# Altium PCB battery.PcbDoc
Units mm, origin at the board's own origin, x right, y up, seen from the top; angles counter-clockwise.
Board outline 59.4 x 23.11 mm, 2 copper layers (Top Layer, Bottom Layer), stack 1.391 mm thick; 6 components, 3 nets, 8 pads, 25 vias.
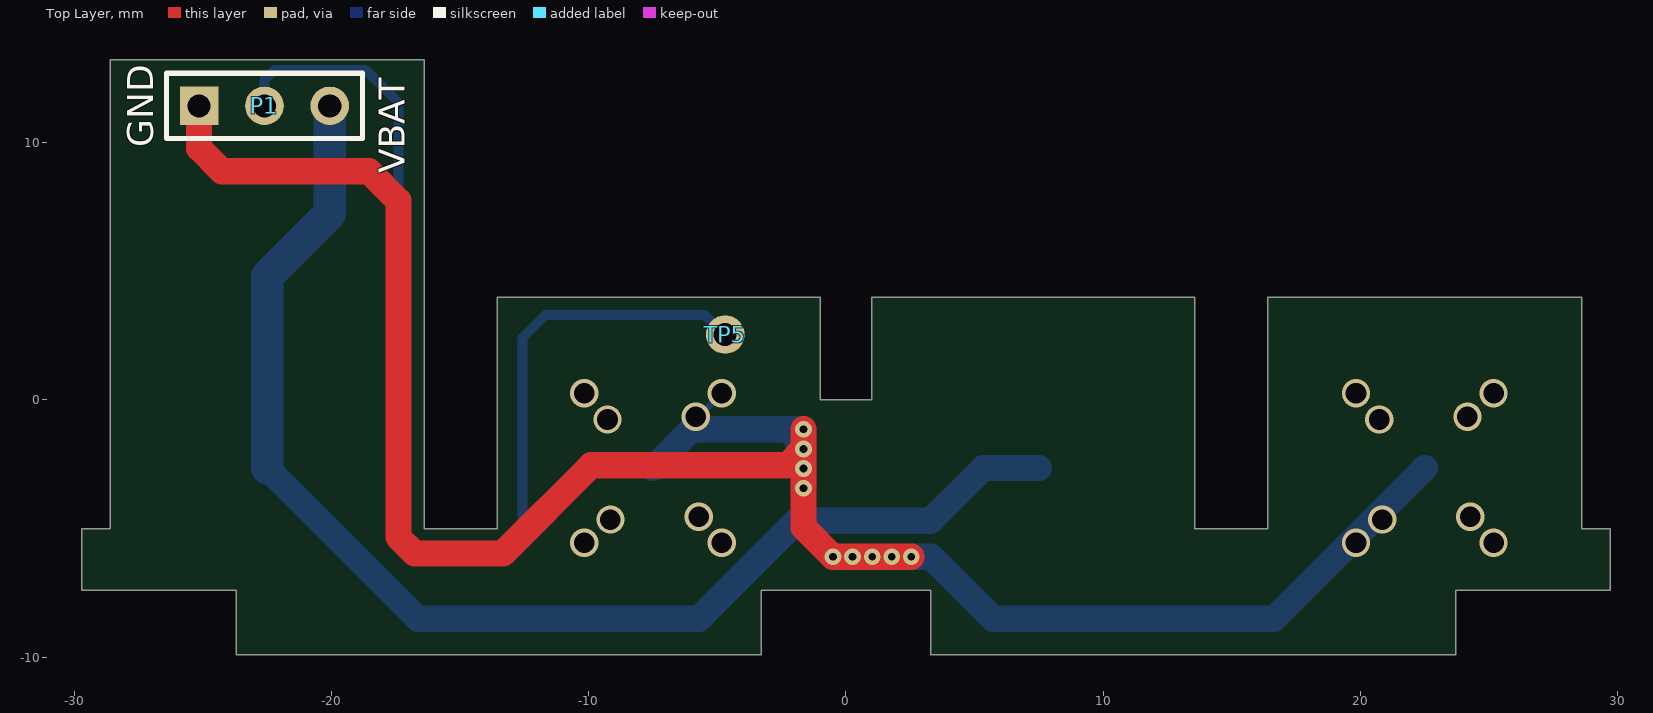
[diagram p0: Top Layer view]
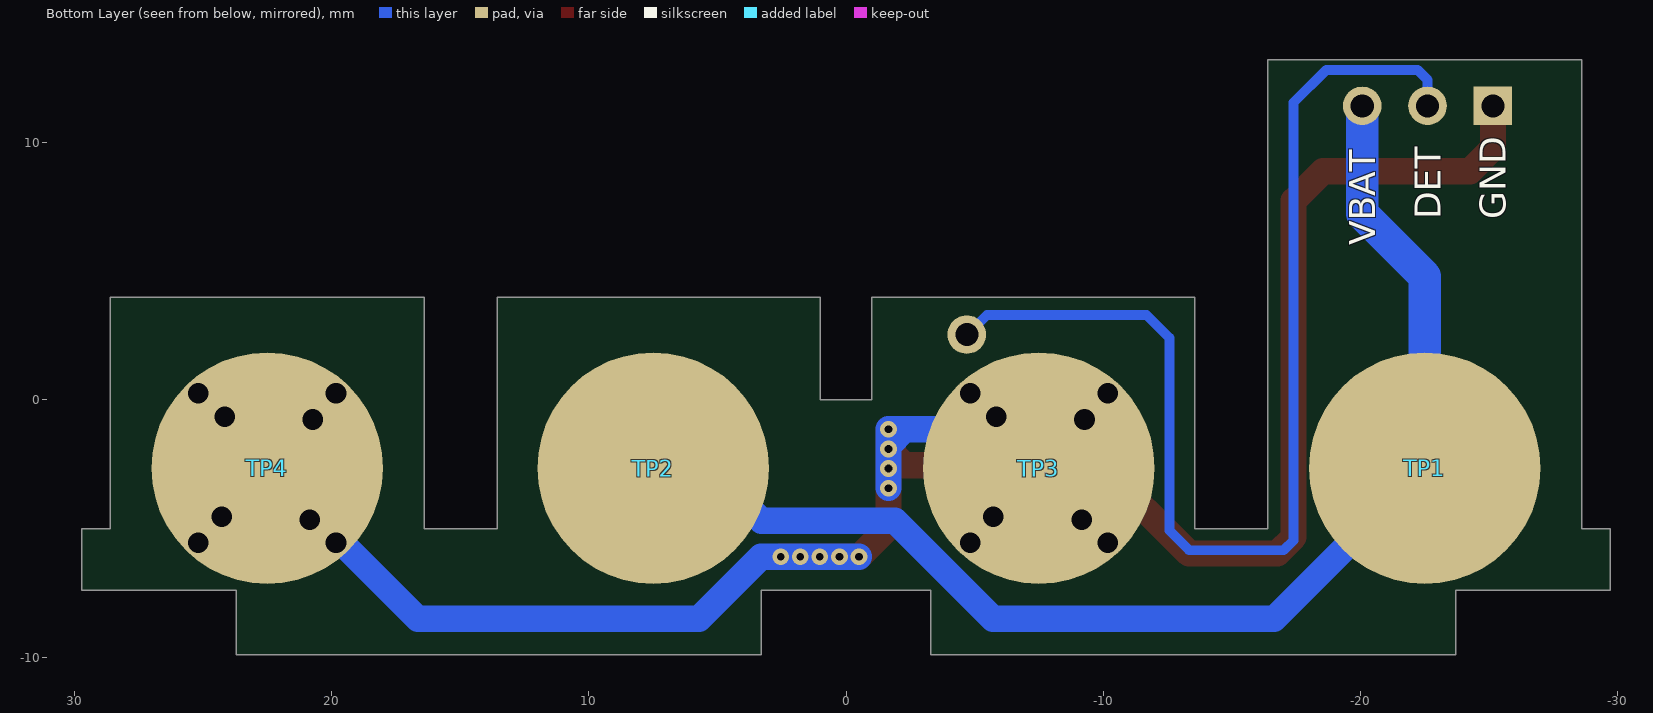
[diagram p1: Bottom Layer view, seen from below]

## Layer stack, top to bottom
Top Solder: solder mask 0.0102, Solder Resist, Dk 3.5
Top Layer: signal copper 0.0356
Dielectric 1: dielectric 1.32, FR-4, Dk 4.8
Bottom Layer: signal copper 0.0356
Bottom Solder: solder mask 0.0102, Solder Resist, Dk 3.5

## Board outline
-23.7,-9.9 -23.7,-7.4 -29.7,-7.4 -29.7,-5 -28.6,-5 -28.6,13.214 -16.4,13.214 -16.4,-5 -13.55,-5 -13.55,4 -1,4 -1,0 1,0 1,4 13.55,4 13.55,-5 16.4,-5 16.4,4 28.6,4 28.6,-5 29.7,-5 29.7,-7.4 23.7,-7.4 23.7,-9.9 3.3,-9.9 3.3,-7.4 -3.3,-7.4 -3.3,-9.9

## Design rules (kind name [scope] priority, off if disabled: settings)
Clearance [All] p1: gap=0.254 ignorepadtopadclearanceinfootprint=FALSE except(0: Arc-Hole Track-Hole SMDPad-Hole THPad-Hole Via-Hole Fill-Hole Poly-Hole Region-Hole Text-Hole)
PolygonConnect [All] p1: connectstyle=Relief reliefconductorwidth=0.254 reliefentries=4 polygonreliefangle="90 Angle" airgapwidth=0.254
RoutingVias [All] p1: holewidth=0.3 width=1.27 viastyle="Through Hole" minholewidth=0.3 minwidth=0.65 maxholewidth=1 maxwidth=2
SolderMaskExpansion [All] p1: expansion=0.102 istentingtop=FALSE
Width [All] p1: maxlimit=1.27 minlimit=0.254 preferedwidth=0.254 minimp=50.000000 maximp=50.000000 favimp=50.000000
30 further rules are at their usual default settings.

## Components (designator, comment, footprint, x,y, rotation, side; value= is the part's Value field where it differs from the comment)
P1 "Goldpin" P_HEADER_1x3_2.54 -25.146,11.43 r0 top value=DS1021-1*3SF1-1
TP1 "SMD pad" TP_PAD#1 -22.5,-2.65 r90 bottom
TP2 "SMD pad" TP_PAD#2 7.5,-2.65 r90 bottom
TP3 "SMD pad" TP_PAD#1 -7.5,-2.65 r90 bottom
TP4 "SMD pad" TP_PAD#1 22.5,-2.65 r90 bottom
TP5 "Single pin" TP_1PIN -6.604,5.588 r0 top

## Footprints (in the part's own frame and the unit in brackets; to place one, negate y for a bottom-side part, rotate by r counter-clockwise, add the part's x,y. Pads: shape width x height; smd on the part's side, far side on the other; paste and mask are expansions set on the pad)
P_HEADER_1x3_2.54 [mm] "Connector; Header; 3 Position, Male"
  rect 1.5x1.5 hole 0.9: 1(0,0)
  round 1.5 hole 0.9: 2(2.54,0) 3(5.08,0)
  silkscreen extent -1.27,-1.27 6.35,1.27, body extent -1.17,-1.25 6.45,1.25, height 8.2
TP_1PIN [mm] "Testpoint; 1 Pin;"
  round 1.5 hole 0.9: 1(1.905,-3.048)
TP_PAD#1 [mm] "Small SMD testpoint"
  round 9 smd paste-0.406: 1(0,0)
TP_PAD#2 [mm] "Small SMD testpoint"
  round 9 smd paste-0.406: 1(0,-0.005)

## Part data
P1: library part P_HEADER_1x3_2.54, "Pin Header", Manufacturer=Connfly, Manufacturer Part Number=DS1021-1*3SF1-1, Supplier Part Number 1=ZL201-03G, HelpURL=http://www.tme.eu/en/Document/cc301e58a5da78cb543a94b5a5b7f06a/DS1021.pdf, Part Number=P_HEADER_1x3_2.54, SCH_Footprint="1x3 2.54mm", Supplier 1=TME, Supplier 2="RS Components", Supplier 3=Farnell, Supplier 4=Mouser, Supplier 5=Digi-Key, Supplier 6=LCSC
TP1 TP2 TP3 TP4: library part TP_PAD, "Testpoint", Part Number=TP_PAD, SCH_Footprint=SMD, Supplier 1=TME, Supplier 2="RS Components", Supplier 3=Farnell, Supplier 4=Mouser, Supplier 5=Digi-Key, Supplier 6=LCSC
TP5: library part TP_1PIN, "Testpoint", Part Number=TP_1PIN, SCH_Footprint=Single, Supplier 1=TME, Supplier 2="RS Components", Supplier 3=Farnell, Supplier 4=Mouser, Supplier 5=Digi-Key, Supplier 6=LCSC

## Via types
v1: diameter 1.1, hole 0.8, Top Layer to Bottom Layer, 16 vias
v2: diameter 0.65, hole 0.3, Top Layer to Bottom Layer, tented both sides, 9 vias

## Nets (pads, with @x,y where several pads share a name; then routed paths per layer and width w, separated by ;. In a path a pad name is that pad's centre, name@x,y a point inside that pad or via, vN(x,y) a via of type N, cw(c..) or ccw(c..) an arc to the next point about the centre after c; other vN are vias at no path point)
BALANCER: P1.2 TP5.1 | length 45.1
  Bottom Layer w0.381: P1.2 -22.606,12.446 -22.225,12.827 -18.669,12.827 -17.399,11.557 -17.399,-5.461 -17.018,-5.842 -13.335,-5.842 -12.573,-5.08 -12.573,2.413 -11.684,3.302 -5.482,3.302 -4.847,2.667 TP5.1@-4.826,2.667
GND: P1.1 TP3.1 TP4.1 | length 89.6
  Top Layer w1.016: P1.1 -25.146,9.779 -24.257,8.89 -18.542,8.89 -17.399,7.747 -17.399,-5.334 -16.764,-5.969 -13.335,-5.969 -9.906,-2.54 -2.286,-2.54 v2(-1.651,-1.905) ; v2(-1.651,-1.143) v2(-1.651,-1.905) ; v2(2.54,-6.096) v2(1.778,-6.096) v2(1.016,-6.096) v2(0.254,-6.096) v2(-0.508,-6.096) -1.651,-4.953 v2(-1.651,-3.429) v2(-1.651,-2.667) v2(-1.651,-1.905)
  Bottom Layer w0.254: TP3.1 -7.5,-2.42 v1(-4.826,0.254)
  Bottom Layer w1.016: TP3.1 -5.993,-1.143 -2.286,-1.143 ; v2(-1.651,-3.429) v2(-1.651,-2.667) v2(-1.651,-1.905) v2@-1.651,-1.778 ; v2(-0.508,-6.096) v2(0.254,-6.096) v2(1.016,-6.096) v2(1.778,-6.096) v2(2.54,-6.096) 3.302,-6.096 5.715,-8.509 16.641,-8.509 TP4.1 ; -2.286,-1.143 v2(-1.651,-1.143) v2@-1.651,-1.778 ; -2.286,-1.143 v2@-1.651,-1.778
  other v1: -10.174,-5.554 -4.826,-5.554 19.826,-5.554 25.174,-5.554 -9.158,-4.651 20.842,-4.651 -5.729,-4.538 24.271,-4.538 -9.271,-0.762 20.729,-0.762 -5.842,-0.649 24.158,-0.649 -10.174,0.254 19.826,0.254 25.174,0.254
VBAT: P1.3 TP1.1 TP2.1 | length 49.9
  Bottom Layer w1.016: TP1.1 -16.641,-8.509 -5.715,-8.509 -1.905,-4.699 3.286,-4.699 5.335,-2.65 TP2.1
  Bottom Layer w1.27: TP1.1 -22.5,4.805 -20.066,7.239 P1.3

## Silkscreen, mask and mechanical layers (free items; w line width, h text height)
Top Overlay:
  text "GND" at -26.924,9.822 h1.02 r90
  text "VBAT" at -17.145,8.806 h1.02 r90
Bottom Overlay:
  text "GND" at -25.654,7.028 h1.02 r270
  text "DET" at -23.114,7.028 h1.02 r270
  text "VBAT" at -20.574,6.012 h1.02 r270
Mechanical 1:
  lines w0.254: -29.7,-7.4 -23.7,-7.4 -23.7,-9.9 -3.3,-9.9 -3.3,-7.4 0,-7.4 3.3,-7.4 3.3,-9.9 23.7,-9.9 23.7,-7.4 29.7,-7.4 29.7,-5 28.6,-5 28.6,4 16.4,4 16.4,-5 13.55,-5 13.55,4 1,4 1,0 0,0 -1,0 -1,4 -13.55,4 -13.55,-5 -16.4,-5 -16.4,13.214 -28.6,13.214 -28.6,-5 -29.7,-5 -29.7,-7.4